# Altium PCB SS_MB_CONV1.1.PcbDoc (part 3 of 3)
Units mil, origin at the board's own origin, x right, y up, seen from the top; angles counter-clockwise.
Board outline 10350 x 8520 mil, 2 copper layers (Top Layer, Bottom Layer); 190 components, 282 nets, 1015 pads, 457 vias.
Unrouted connection lines stored in the file: 1.
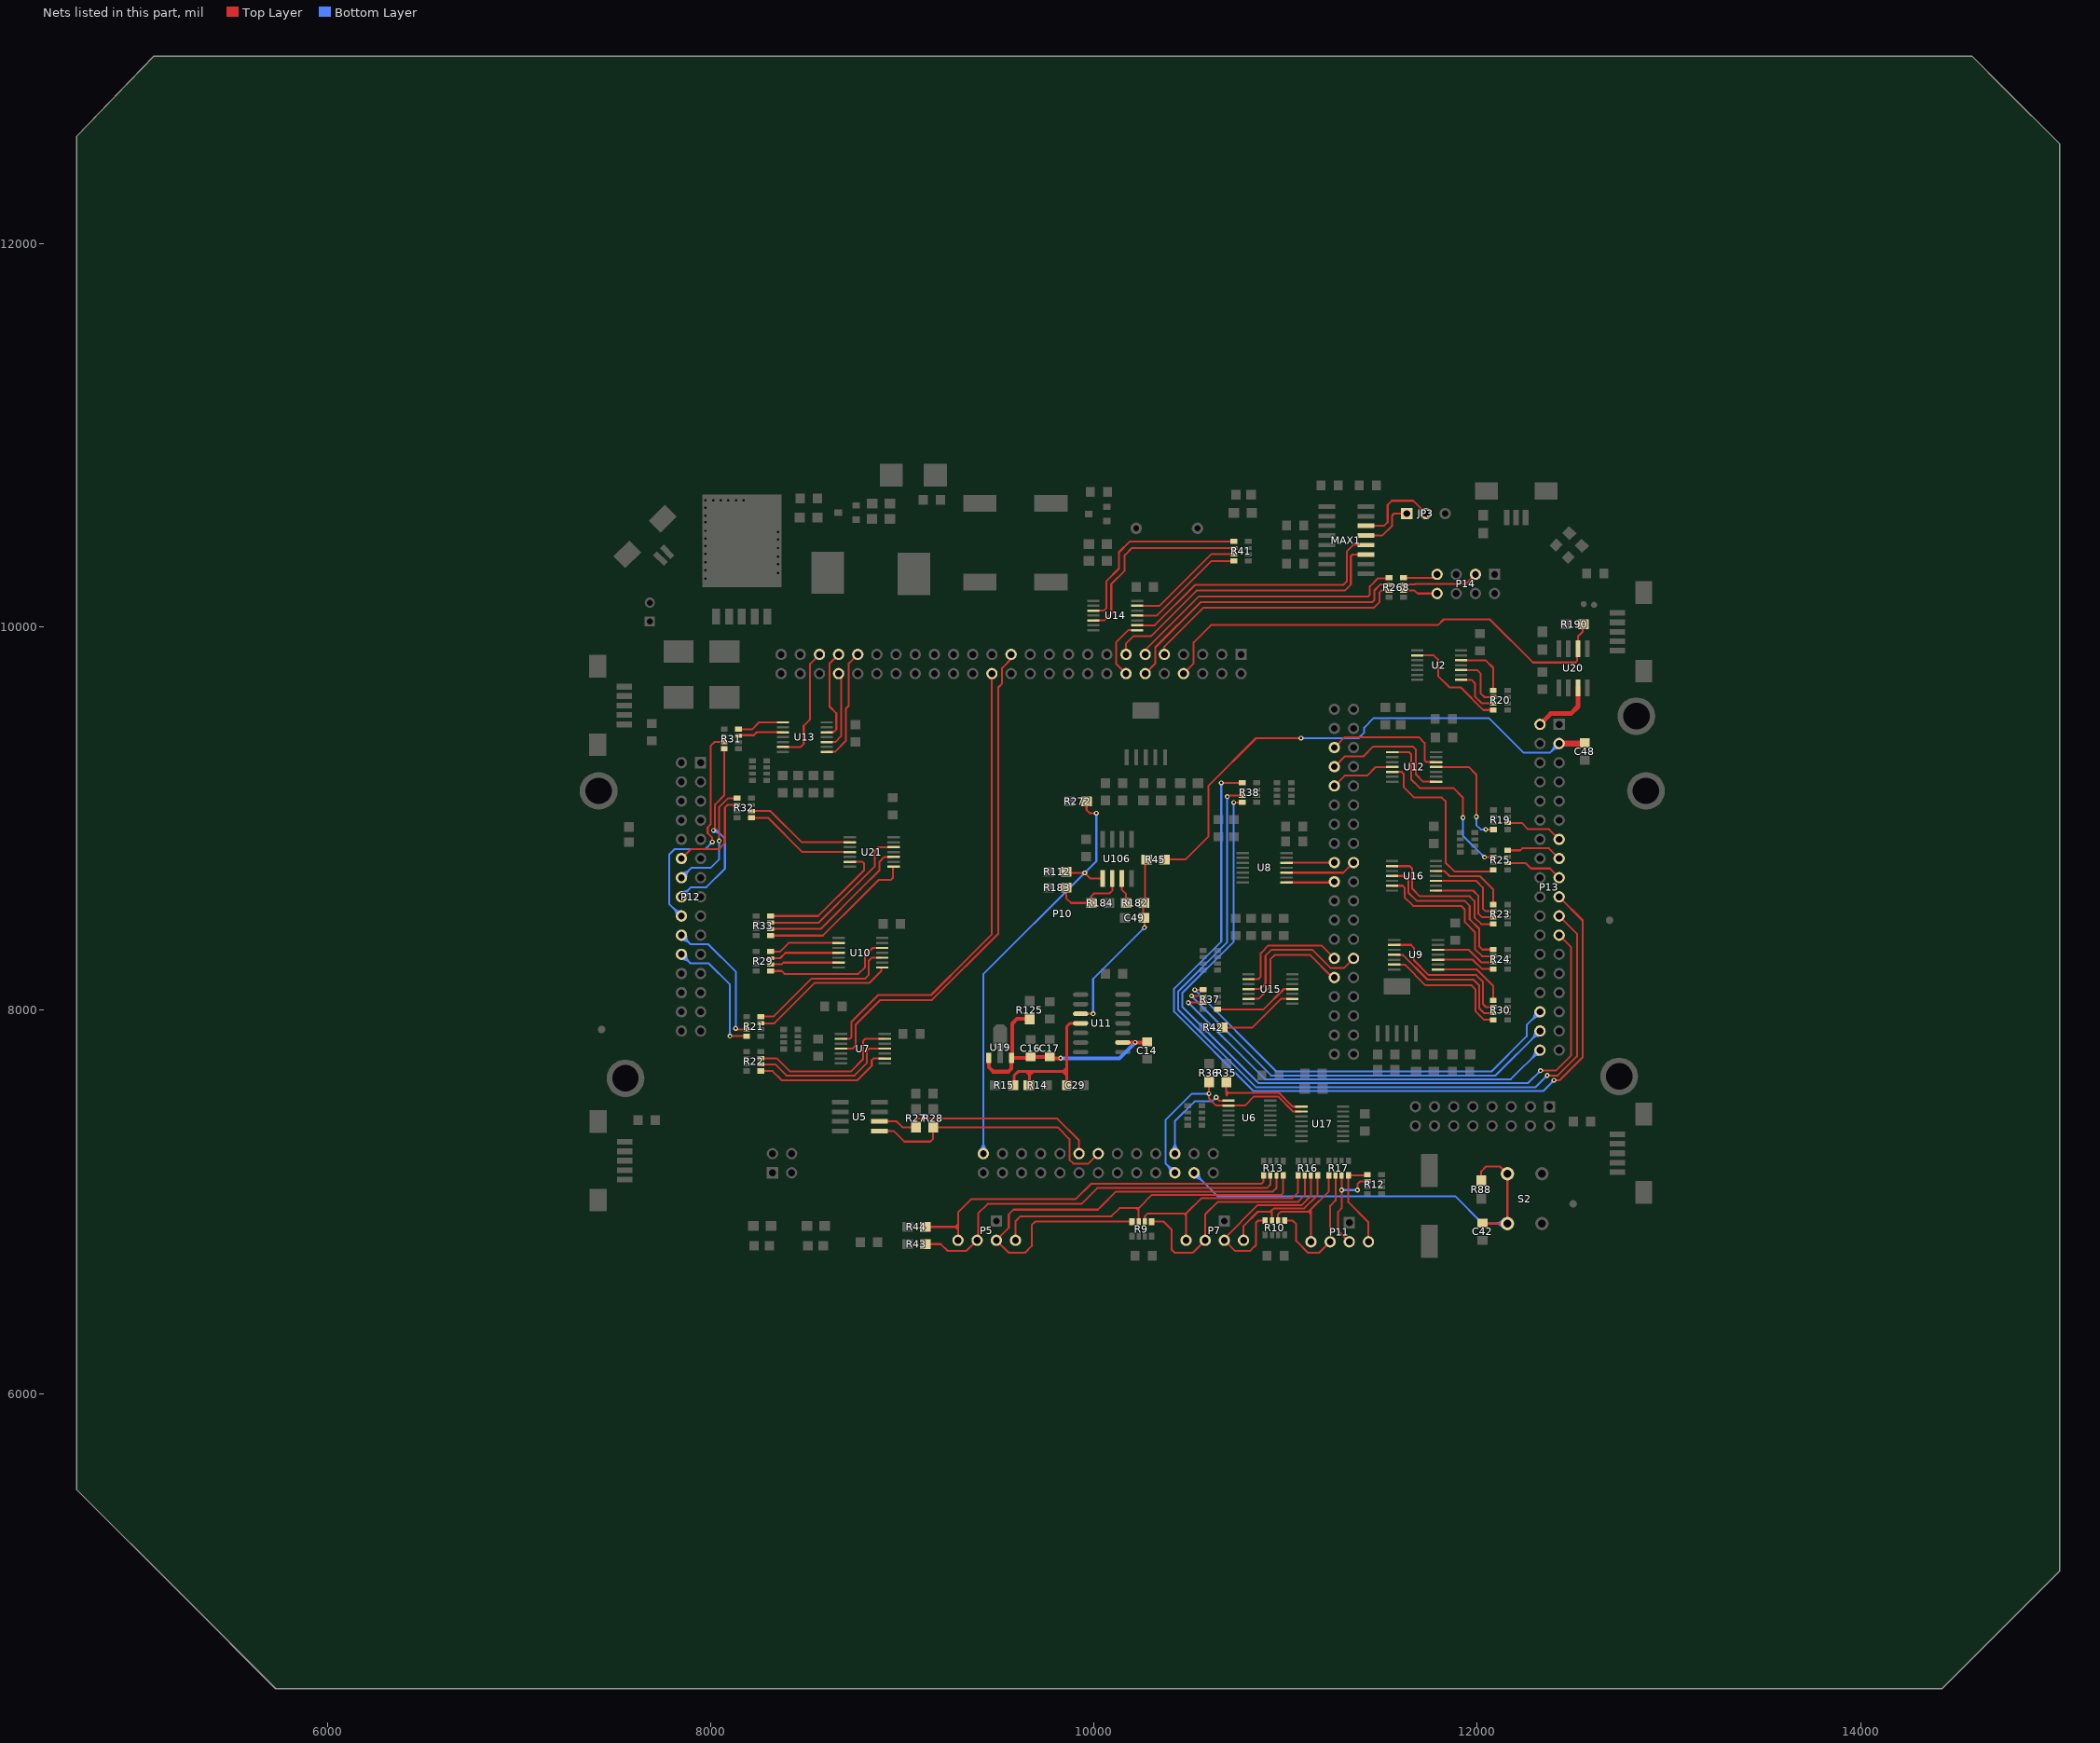
[diagram p3: the nets of this part, all layers, seen from the top]

## Via types
v1: diameter 25, hole 12, Top Layer to Bottom Layer, 365 vias
v2: diameter 50, hole 28, Top Layer to Bottom Layer, 86 vias
v3: diameter 35, hole 28, Top Layer to Bottom Layer, 6 vias

## Nets (pads, with @x,y where several pads share a name; then routed paths per layer and width w, separated by ;. In a path a pad name is that pad's centre, name@x,y a point inside that pad or via, vN(x,y) a via of type N, cw(c..) or ccw(c..) an arc to the next point about the centre after c; other vN are vias at no path point) (continued)
NetR19_7: R19.7 U12.11 | length 665.4
  Top Layer w10: U12.11@11780,9270 11955,9270 11995,9230 v1(11995,9010) ; v1(12044,8944) 12096.01,8944 R19.7@12097.01,8943
  Bottom Layer w10: v1@11989.7,9004.7 cw(c11976.89,8991.89) 11995,8991.89 cw(c12013.11,8991.89) v1@12000.3,9004.7 ; v1(11995,9010) 11995,8967 12018,8944 v1(12044,8944) v1@12046,8944 ; v1@12038.7,8938.7 ccw(c12025.89,8925.89) 12025.89,8944 ccw(c12025.89,8962.11) v1@12038.7,8949.3
NetR20_1: R20.1 U2.12 | length 307.5
  Top Layer w10: U2.12@11910,9826.77 12043.23,9826.77 12083.01,9786.99 R20.1@12083.01,9669
NetR20_3: R20.3 U2.10 | length 292
  Top Layer w10: U2.10@11910,9775.59 11998.41,9775.59 12018,9756 12018,9653 12037,9634 R20.3@12083.01,9634
NetR20_5: R20.5 U2.8 | length 264.1
  Top Layer w10: U2.8@11910,9724.41 11969.59,9724.41 11987,9707 11987,9638 12023,9602 R20.5@12083.01,9602
NetR20_7: R20.7 U2.2 | length 559.5
  Top Layer w10: U2.2@11691.5,9852.36 11772.64,9852.36 11795,9830 11795,9745 11855,9685 11913,9685 12031,9567 R20.7@12083.01,9567
NetR21_2: R21.2 U10.10 | length 799.9
  Top Layer w10: R21.2@8261.81,7967 8327,7967 8526,8166 8806,8166 8825,8185 8825,8260 8840,8275 8889.41,8275 U10.10@8890,8274.41
NetR21_4: R21.4 U10.8 | length 759.5
  Top Layer w10: R21.4@8261.81,7932 8332,7932 8544,8144 8829,8144 8890,8205 U10.8@8890,8223.23
NetR22_4: R22.4 U7.13 | length 797.2
  Top Layer w10: R22.4@8261.81,7750 8344.04,7750 8414.04,7680 8730,7680 8795,7745 8795,7840 8806.18,7851.18 U7.13@8903.5,7851.18
NetR22_6: R22.6 U7.11 | length 761.8
  Top Layer w10: R22.6@8261.81,7718 8337,7718 8395,7660 8750,7660 8815,7725 8815,7790 8825,7800 U7.11@8903.5,7800
NetR22_8: R22.8 U7.9 | length 726.3
  Top Layer w10: R22.8@8261.81,7683 8322,7683 8370,7635 8765,7635 8840,7710 8840,7740 8848.82,7748.82 U7.9@8903.5,7748.82
NetR23_1: R23.1 U16.12 | length 423.2
  Top Layer w10: U16.12@11778.5,8726.77 11828.23,8726.77 11855,8700 12014,8700 12083,8631 R23.1@12083,8552
NetR23_3: R23.3 U16.10 | length 434.6
  Top Layer w10: U16.10@11778.5,8675.59 11994.41,8675.59 12029,8641 12029,8531 12043,8517 R23.3@12083,8517
NetR23_5: R23.5 U16.8 | length 416.7
  Top Layer w10: U16.8@11778.5,8624.41 11978.59,8624.41 12006,8597 12006,8504 12025,8485 R23.5@12083,8485
NetR23_7: R23.7 U16.2 | length 759.5
  Top Layer w10: U16.2@11560,8752.36 11647.64,8752.36 11660,8740 11660,8635 11700,8595 11960,8595 11985,8570 11985,8485 12020,8450 R23.7@12083,8450
NetR24_1: R24.1 U16.4 | length 817.4
  Top Layer w10: U16.4@11560,8701.18 11622.82,8701.18 11640,8684 11640,8615 11685,8570 11935,8570 11960,8545 11960,8475 12010,8425 12010,8333 12026,8317 R24.1@12083,8317
NetR24_3: R24.3 U16.6 | length 794.3
  Top Layer w10: U16.6@11560,8650 11610,8650 11620,8640 11620,8590 11665,8545 11915,8545 11935,8525 11935,8460 11987,8408 11987,8320 12025,8282 R24.3@12083,8282
NetR24_5: R24.5 U9.12 | length 320.2
  Top Layer w10: U9.12@11790,8315.59 11955.41,8315.59 12021,8250 R24.5@12083,8250
NetR24_7: R24.7 U9.10 | length 313.5
  Top Layer w10: U9.10@11790,8264.41 11975.59,8264.41 12025,8215 R24.7@12083,8215
NetR25_3: R25.3 U12.1 | length 998.4
  Top Layer w10: U12.1@11561.5,9346.77 11643.23,9346.77 11655,9335 11655,9205 11700,9160 11875,9160 11925,9110 v1(11925,9005) ; v1(12037,8799) 12038,8800 R25.3@12083.01,8800
  Bottom Layer w10: v1@11919.7,8999.7 cw(c11906.89,8986.89) 11925,8986.89 cw(c11943.11,8986.89) v1@11930.3,8999.7 ; v1(11925,9005) 11925,8911 v1(12037,8799) ; v1@12029.5,8799 ccw(c12011.39,8799) 12024.2,8811.8 ccw(c12037,8824.61) v1@12037,8806.5
NetR25_7: R25.7 U12.5 | length 971.1
  Top Layer w10: U12.5@11561.5,9244.41 11605.59,9244.41 11615,9235 11615,9165 11670,9110 11815,9110 11835,9090 11835,8770 11880,8725 R25.7@12089.01,8725
NetR29_2: R29.2 U10.2 | length 463.3
  Top Layer w10: R29.2@8315,8305 8360,8305 8406.18,8351.18 8671.5,8351.18 8583.82,8351.18
NetR29_4: R29.4 U10.4 | length 403.1
  Top Layer w10: R29.4@8300,8272 8362,8272 8390,8300 8610,8300 ; 8590,8300 8610,8300 ; U10.4@8671.5,8300 8610,8300
NetR29_6: R29.6 U10.6 | length 419
  Top Layer w10: R29.6@8300,8240 8370,8240 8378.82,8248.82 8555,8248.82 ; 8511.18,8248.82 8555,8248.82 ; U10.6@8671.5,8248.82 8555,8248.82
NetR29_8: R29.8 U10.12 | length 697.5
  Top Layer w10: R29.8@8300,8205 8370,8205 8385,8190 8545,8190 ; 8535,8190 8545,8190 ; U10.12@8890,8325.59 8845.59,8325.59 8805,8285 8805,8225 8770,8190 8545,8190
NetR30_1: R30.1 U9.8 | length 404.3
  Top Layer w10: U9.8@11790,8213.23 11997.77,8213.23 12083,8128 R30.1@12083,8052
NetR30_3: R30.3 U9.2 | length 752.4
  Top Layer w10: U9.2@11571.5,8341.18 11653.82,8341.18 11670,8325 11670,8260 11746,8184 11994.08,8184 12030,8148.08 12030,8031 12044,8017 R30.3@12083,8017
NetR30_5: R30.5 U9.4 | length 708.1
  Top Layer w10: U9.4@11571.5,8290 11610,8290 11740,8160 11980,8160 12010,8130 12010,8010 12035,7985 R30.5@12083,7985
NetR30_7: R30.7 U9.6 | length 698.5
  Top Layer w10: U9.6@11571.5,8238.82 11621.18,8238.82 11730,8130 11970,8130 11990,8110 11990,7995 12035,7950 R30.7@12083,7950
NetR31_2: R31.2 U13.1 | length 253.2
  Top Layer w10: R31.2@8142.99,9467 8217,9467 8252.36,9502.36 U13.1@8381.5,9502.36
NetR31_4: R31.4 U13.3 | length 246.4
  Top Layer w10: R31.4@8142.99,9432 8146.61,9435.62 8225,9435.62 8240.56,9451.18 U13.3@8381.5,9451.18
NetR32_6: R32.6 U21.2 | length 599.1
  Top Layer w10: R32.6@8200,9040 8311,9040 8474.23,8876.77 U21.2@8731.5,8876.77
NetR32_8: R32.8 U21.4 | length 605.8
  Top Layer w10: R32.8@8200,9005 8299,9005 8478.41,8825.59 U21.4@8731.5,8825.59
NetR33_2: R33.2 U21.6 | length 694.2
  Top Layer w10: R33.2@8311.81,8492 8561,8492 8766,8697 8800,8731 8800,8766 8791.59,8774.41 U21.6@8731.5,8774.41
NetR33_4: R33.4 U21.12 | length 848.3
  Top Layer w10: R33.4@8311.81,8457 8562,8457 8767,8662 8855,8750 8855,8830 8876.18,8851.18 U21.12@8950,8851.18
NetR33_6: R33.6 U21.10 | length 819.9
  Top Layer w10: R33.6@8311.81,8425 8575,8425 8780,8630 8880,8730 8880,8775 8905,8800 U21.10@8950,8800
NetR33_8: R33.8 U21.8 | length 821.3
  Top Layer w10: R33.8@8311.81,8390 8585,8390 8790,8595 8875,8680 8940,8680 8950,8690 U21.8@8950,8748.82
NetR37_8: R37.8 U15.11 | length 434
  Top Layer w10: R37.8@10640,8005 10885,8005 10991.18,8111.18 U15.11@11030,8111.18
NetR41_1: R41.1 U14.3 | length 1010
  Top Layer w10: U14.3@10001.5,10085.59 10050.59,10085.59 10065,10100 10065,10240 10130,10305 10130,10390 10187,10447 R41.1@10730,10447
NetR41_3: R41.3 U14.5 | length 1022.6
  Top Layer w10: U14.5@10001.5,10034.41 10054.41,10034.41 10090,10070 10090,10225 10160,10295 10160,10375 10197,10412 R41.3@10730,10412
NetR41_5: R41.5 U14.13 | length 621.3
  Top Layer w10: U14.13@10220,10111.18 10342.18,10111.18 10611,10380 R41.5@10730,10380
NetR41_7: R41.7 U14.11 | length 628.1
  Top Layer w10: U14.11@10220,10060 10328,10060 10613,10345 R41.7@10730,10345
NetR42_1: R42.1 U15.9 | length 422.1
  Top Layer w10: R42.1@10670,7910 10826,7910 10976,8060 U15.9@11030,8060
NetR182_1: R182.1 U106.3 | length 153.8
  Top Layer w10: U106.3@10145,8687.64 10145,8629 10167,8607 R182.1@10167,8582 ; R182.1@10167,8560 10167,8599
NetR183_1: R183.1 R184.1 U106.2 | length 416
  Top Layer w10: R183.1@9855,8640 9855,8585 9880,8560 R184.1@9985,8560 9985,8595 10000,8610 10081,8610 10095,8624 U106.2@10095,8687.64
RECEIVE_TO_FPGA: JP3.1 MAX1.13 | length 292.1
  Top Layer w10: MAX1.13@11418.72,10478 11505,10478 11555,10528 11555,10582 11565,10592 JP3.1@11632,10592
RES: P14.7 R268.2 | length 194.5
  Top Layer w10: R268.2@11602.99,10257 11772,10257 P14.7@11790,10275
RES_F: P10.11 R268.1 | length 1477.3
  Top Layer w10: P10.11@10267,9857 10267,9880 10547,10160 11430,10160 11439,10169 11439,10212 11481.19,10254.19 11537.19,10254.19 R268.1@11540,10257
RXD0: MAX1.12 U14.9 | length 1466.6
  Top Layer w10: U14.9@10220,10008.82 10316.82,10008.82 10528,10220 11301,10220 11319,10238 11319,10394 11353,10428 MAX1.12@11418.72,10428 MAX1.12@11416.72,10430
RXD0_F: P10.14 U14.8 | length 315.7
  Top Layer w10: P10.14@10167,9757 10115,9809 10115,9920 10178.23,9983.23 U14.8@10220,9983.23
S1: P5.2 R13.8 R44.1 | length 2070.7
  Top Layer w10: R44.1@9120,6870 9271,6870 ; P5.2@9290,6800 9290,6870 ; 9290,6856 9276,6870 9271,6870 ; 9290,6885 9275,6870 9271,6870 ; R13.8@10885,7150 10885,7106 10874,7095 9985,7095 9904.97,7014.97 9359.97,7014.97 9290,6945 9290,6870 ; 9271,6870 9290,6870
S2: P5.3 R13.6 R43.1 | length 2096.5
  Top Layer w10: R43.1@9120,6780 9200,6780 9235,6745 9335,6745 P5.3@9390,6800 9395,6805 9395,6940 9445,6990 9935,6990 10017,7072 10902,7072 10920,7090 R13.6@10920,7150
S3: P5.4 R9.7 R13.4 | length 2578.2
  Top Layer w10: 10025,6965 10037.5,6977.5 ; R9.7@10198,6897.99 10162.99,6897.99 9692.99,6897.99 9675,6880 9675,6770 9640,6735 9555,6735 P5.4@9490,6800 9555,6865 9555,6935 9580,6960 10020,6960 10037.5,6977.5 ; R13.4@10952,7150 10952,7072 10934,7054 10114,7054 10037.5,6977.5
S4: P5.5 R9.5 R13.2 | length 1754.3
  Top Layer w10: P5.5@9590,6800 9590,6900 9615,6925 10090,6925 10133,6968 10215,6968 ; R9.5@10233,6897.99 10233,6932 10233,6968 ; 10233,6955 10220,6968 10215,6968 ; R13.2@10987,7150 10987,7047 10977,7037 10302,7037 10233,6968 ; 10215,6968 10233,6968
S5: P7.2 R9.3 R16.1 | length 1135.9
  Top Layer w10: R9.3@10265,6897.99 10265,6925 10280,6940 10480,6940 ; 10467,6940 10469,6940 10480,6929 ; P7.2@10480,6800 10480,6929 ; R16.1@11064.5,7150.36 11064.5,7049.5 11035,7020 10561,7020 10480,6939 10480,6929
S6: P7.3 R9.1 R16.3 | length 1247.5
  Top Layer w10: R9.1@10300,6897.99 10362.01,6897.99 10405,6855 10405,6750 10420,6735 10515,6735 P7.3@10580,6800 10580,6935 10646,7001 11066,7001 11099.5,7034.5 R16.3@11099.5,7150.36
S7: P7.4 R10.7 R16.5 | length 1041.3
  Top Layer w10: R10.7@10893,6902.99 10856.99,6902.99 10845,6891 10845,6775 10815,6745 10735,6745 P7.4@10680,6800 10680,6810 10854,6984 11084,6984 11131.5,7031.5 R16.5@11131.5,7150.36
S8: P7.5 R10.5 R16.7 | length 729.1
  Top Layer w10: P7.5@10780,6800 10780,6874 10855,6949 10920,6949 ; R10.5@10928,6902.99 10928,6933 ; R16.7@11166.5,7150.36 11166.5,7036.5 11097,6967 10938,6967 ; 10920,6949 10928,6941 10928,6933 ; 10920,6949 10938,6967 ; 10928,6933 10928,6957 10938,6967
S9: P11.2 R10.3 R17.1 | length 692.5
  Top Layer w10: R10.3@10960,6902.99 10960,6935 10975,6950 11118,6950 ; 11113,6950 11120,6950 11132,6962 ; 11132,6833 P11.2@11132,6792 11132,6918 11132,6962 ; 11132,6935 11132,6936 11118,6950 ; 11132,6950 11118,6950 ; R17.1@11225,7150 11225,7055 11132,6962
S10: P11.3 R10.1 R17.3 | length 762.7
  Top Layer w10: R10.1@10995,6902.99 11036.01,6902.99 11055,6884 11055,6797 11117,6735 11175,6735 P11.3@11232,6792 ; P11.3@11232,6793 P11.3@11232,6792 ; R17.3@11260,7150 11260,7008 11232,6980 P11.3@11232,6792
  Bottom Layer w10: P11.3@11221.06,6812 P11.3@11232,6812
S11: P11.4 R12.3 R17.5 | length 660.4
  Top Layer w10: R17.5@11292,7150 11292,6967 11273.53,6948.53 11273.53,6850.47 P11.4@11332,6792 11302,6822 ; v1(11375,7062) 11375,7093 11390,7108 R12.3@11426.01,7108
  Bottom Layer w10: v1(11292,7062) v1(11375,7062) ; v1@11297.3,7056.7 cw(c11310.11,7043.89) 11310.11,7062 cw(c11310.11,7080.11) v1@11297.3,7067.3 ; v1@11369.7,7056.7 ccw(c11356.89,7043.89) 11356.89,7062 ccw(c11356.89,7080.11) v1@11369.7,7067.3
S12: P11.5 R12.1 R17.7 | length 484.2
  Top Layer w10: R17.7@11327,7132 11327,6998 11432,6893 P11.5@11432,6792 ; R17.7@11327,7139 11422.01,7139 R12.1@11426.01,7143
SA_1: P12.14 R32.1 | length 797.8
  Top Layer w10: v1(8044,8884) 8044,9061 8090,9107 R32.1@8137.01,9107
  Bottom Layer w10: P12.14@7847,8692 7898,8743 7998,8743 8044,8789 v1(8044,8884) ; P12.14@7847,8706.53 ccw(c7847,8741.6) 7871.8,8716.8 ccw(c7896.6,8692) P12.14@7861.53,8692 ; P12.14@7847,8716.53 ccw(c7847,8775.74) 7888.87,8733.87 ccw(c7930.74,8692) P12.14@7871.53,8692 ; v1@8038.7,8878.7 cw(c8025.89,8865.89) 8044,8865.89 cw(c8062.11,8865.89) v1@8049.3,8878.7
SA_1_F: P10.43 U13.12 | length 491.4
  Top Layer w10: U13.12@8600,9451.18 8641.18,9451.18 ; 8644.48,9454.48 8641.18,9451.18 ; P10.43@8667,9857 8620,9810 8620,9585 8655,9550 8655,9465 8641.18,9451.18
SA_2: P13.15 R25.2 | length 293.1
  Top Layer w10: R25.2@12160,8835 12225,8835 12235,8845 12374,8845 P13.15@12427,8792
SA_2_F: P10.144 U12.8 | length 720.5
  Top Layer w10: P10.144@11254,9271 11308,9325 11405,9325 11455,9375 11665,9375 11680,9360 11680,9230 11716.77,9193.23 U12.8@11780,9193.23
SA_3: P13.21 R38.5 | length 4447
  Top Layer w10: v1(10695,9115) 10700,9120 R38.5@10780,9120 ; v1(12365,7660) 12420,7660 12520,7760 12520,8399 P13.21@12427,8492
  Bottom Layer w10: v1@10689.7,9109.7 cw(c10676.89,9096.89) 10695,9096.89 cw(c10713.11,9096.89) v1@10700.3,9109.7 ; v1(10695,9115) 10695,8355 10439,8099 10439,8004 10844,7599 12304,7599 v1(12365,7660) ; v1@12357.5,7660 cw(c12339.39,7660) 12352.2,7647.2 cw(c12365,7634.39) v1@12365,7652.5
SA_3_F: P10.133 U8.10 | length 375.9
  Top Layer w10: U8.10@11000,8718.23 11260,8718.23 11301.23,8718.23 P10.133@11354,8771
SA_4: P12.20 R21.5 | length 894.3
  Top Layer w10: v1(8130,7905) 8135,7900 R21.5@8187.01,7900
  Bottom Layer w10: P12.20@7847,8367.47 cw(c7847,8308.26) 7888.87,8350.13 cw(c7930.74,8392) P12.20@7871.53,8392 ; P12.20@7847,8377.47 cw(c7847,8342.4) 7871.8,8367.2 cw(c7896.6,8392) P12.20@7861.53,8392 ; P12.20@7847,8392 7894,8345 7987,8345 8130,8202 v1(8130,7905) ; v1@8124.7,7910.3 ccw(c8111.89,7923.11) 8130,7923.11 ccw(c8148.11,7923.11) v1@8135.3,7910.3
SA_4_F: P10.28 U7.2 | length 2425.4
  Top Layer w10: U7.2@8685,7851.18 8726.18,7851.18 8735,7860 8735,7941 8874,8080 9150,8080 9360,8290 ; 9367,8297 9360,8290 ; P10.28@9467,9757 9467,8397 9360,8290
SA_DB: P13.32 R37.1 | length 2369.9
  Top Layer w10: v1(10525,8107) R37.1@10577.01,8107
  Bottom Layer w10: v1@10525,8099.5 cw(c10525,8081.39) 10537.8,8094.2 cw(c10550.61,8107) v1@10532.5,8107 ; v1(10525,8107) 10951,7681 12074.1,7681 12257.09,7863.98 12257.09,7922.09 P13.32@12327,7992 ; P13.32@12302.47,7992 cw(c12243.26,7992) 12285.13,7950.13 cw(c12327,7908.26) P13.32@12327,7967.47 ; P13.32@12312.47,7992 cw(c12277.4,7992) 12302.2,7967.2 cw(c12327,7942.4) P13.32@12327,7977.47
SA_DB_F: P10.123 U15.4 | length 787.9
  Top Layer w10: U15.4@10811.5,8111.18 10866.18,8111.18 10895,8140 10895,8285 10925,8315 11140,8315 11235,8220 11303,8220 P10.123@11354,8271
  Bottom Layer w10: P10.123@11354,8271 P10.123@11365,8282
SB_1: P12.12 R32.3 | length 513.8
  Top Layer w10: P12.12@7847,8792 7896,8841 8041,8841 8074,8874 8074,9058 8088,9072 R32.3@8137.01,9072
SB_1_F: P10.41 U13.8 | length 605.4
  Top Layer w10: U13.8@8600,9348.82 8647.82,9348.82 8705,9406 8705,9575 8720,9590 8720,9810 P10.41@8767,9857
SB_2: P13.13 R19.6 | length 302.6
  Top Layer w10: R19.6@12160,8978 12232,8978 12265,8945 12374,8945 P13.13@12427,8892
SB_2_F: P10.146 U12.12 | length 654.7
  Top Layer w10: P10.146@11254,9371 11308,9425 11695,9425 11725,9395 11725,9305 11734.41,9295.59 U12.12@11780,9295.59
SB_3: P13.23 R38.7 | length 4192.9
  Top Layer w10: v1(10729,9085) R38.7@10780,9085 ; v1(12330,7685) 12410,7685 12490,7765 12490,8329 P13.23@12427,8392
  Bottom Layer w10: v1@10723.7,9079.7 cw(c10710.89,9066.89) 10729,9066.89 cw(c10747.11,9066.89) v1@10734.3,9079.7 ; v1(10729,9085) 10729,8359 10461,8091 10461,8018 10859,7620 12265,7620 v1(12330,7685) ; v1@12322.5,7685 cw(c12304.39,7685) 12317.2,7672.2 cw(c12330,7659.39) v1@12330,7677.5
SB_3_F: P10.134 U8.12 | length 264.9
  Top Layer w10: U8.12@11000.59,8770 11000,8769.41 11170,8769.41 ; 11179.41,8769.41 11170,8769.41 ; P10.134@11254,8771 11252.41,8769.41 11170,8769.41
SB_4: P12.18 R31.5 | length 1372.8
  Top Layer w10: v1(8008,8878) 8008,8901 7984,8925 7984,8955 7999,8970 7999,9380 8019,9400 R31.5@8070,9400
  Bottom Layer w10: P12.18@7822.47,8492 ccw(c7763.26,8492) 7805.13,8533.87 ccw(c7847,8575.74) P12.18@7847,8516.53 ; P12.18@7832.47,8492 ccw(c7797.4,8492) 7822.2,8516.8 ccw(c7847,8541.6) P12.18@7847,8506.53 ; P12.18@7847,8492 7783,8556 7783,8812 7812,8841 7971,8841 v1(8008,8878) ; v1@8000.5,8878 cw(c7982.39,8878) 7995.2,8865.2 cw(c8008,8852.39) v1@8008,8870.5
SB_4_F: P10.45 U13.6 | length 610.9
  Top Layer w10: U13.6@8381.5,9374.41 8469.41,9374.41 8485,9390 8485,9485 8518,9518 8518,9808 P10.45@8567,9857
SB_DB: P13.34 R37.3 | length 2331.8
  Top Layer w10: v1(10509,8075) 10574.01,8075 R37.3@10577.01,8072
  Bottom Layer w10: v1@10509,8067.5 cw(c10509,8049.39) 10521.8,8062.2 cw(c10534.61,8075) v1@10516.5,8075 ; v1(10509,8075) 10924,7660 12095,7660 P13.34@12327,7892 ; P13.34@12302.47,7892 cw(c12243.26,7892) 12285.13,7850.13 cw(c12327,7808.26) P13.34@12327,7867.47 ; P13.34@12312.47,7892 cw(c12277.4,7892) 12302.2,7867.2 cw(c12327,7842.4) P13.34@12327,7877.47
SB_DB_F: P10.124 U15.2 | length 615.1
  Top Layer w10: U15.2@10811.5,8162.36 10857.36,8162.36 10870,8175 10870,8298 10910,8338 11187,8338 P10.124@11254,8271
SC_1: P12.16 R31.7 | length 1262.7
  Top Layer w10: v1(8014,8939) 8022,8947 8022,9074 8070,9122 R31.7@8070,9365
  Bottom Layer w10: P12.16@7847,8592 7897,8642 7977,8642 8074,8739 8074,8896 8031,8939 ; P12.16@7847,8606.53 ccw(c7847,8641.6) 7871.8,8616.8 ccw(c7896.6,8592) P12.16@7861.53,8592 ; P12.16@7847,8616.53 ccw(c7847,8675.74) 7888.87,8633.87 ccw(c7930.74,8592) P12.16@7871.53,8592 ; v1@8012.63,8941.09 cw(c8020.55,8928.98) 8030.79,8939.21 ; v1@8014,8931.5 cw(c8014,8872.36) 8055.82,8914.18 ; v1(8014,8939) 8031,8939 ; v1@8014,8941.5 cw(c8014,8906.51) 8038.75,8931.25 ; v1@8018.1,8932.72 cw(c8027.43,8918.44) 8039.5,8930.5 ; v1@8019.54,8933.95 cw(c8031,8923.5) 8031,8939 ; v1@8019.54,8944.06 ccw(c8031,8954.51) 8031,8939
SC_1_F: P10.44 U13.10 | length 424.8
  Top Layer w10: U13.10@8600,9400 8650,9400 8680,9430 8680,9744 P10.44@8667,9757
SC_2: P13.17 R25.6 | length 298.5
  Top Layer w10: R25.6@12160,8768 12252,8768 12280,8740 12379,8740 P13.17@12427,8692
SC_2_F: P10.142 U12.4 | length 348.5
  Top Layer w10: P10.142@11254,9171 11308,9225 11425,9225 11470,9270 U12.4@11561.5,9270
SC_3: P13.19 R38.1 | length 4733.9
  Top Layer w10: v1(10664,9187) R38.1@10780,9187 ; v1(12400,7635) 12430,7635 12550,7755 12550,8469 P13.19@12427,8592
  Bottom Layer w10: v1@10658.7,9181.7 cw(c10645.89,9168.89) 10664,9168.89 cw(c10682.11,9168.89) v1@10669.3,9181.7 ; v1(10664,9187) 10664,8359 10418,8113 10418,7993 10833,7578 12343,7578 v1(12400,7635) ; v1@12392.5,7635 cw(c12374.39,7635) 12387.2,7622.2 cw(c12400,7609.39) v1@12400,7627.5
SC_3_F: P10.132 U8.8 | length 255.6
  Top Layer w10: U8.8@11000,8667.05 11250.05,8667.05 P10.132@11254,8671
SC_4: P12.22 R21.7 | length 851
  Top Layer w10: v1(8100,7865) R21.7@8187.01,7865
  Bottom Layer w10: P12.22@7847,8267.47 cw(c7847,8208.26) 7888.87,8250.13 cw(c7930.74,8292) P12.22@7871.53,8292 ; P12.22@7847,8277.47 cw(c7847,8242.4) 7871.8,8267.2 cw(c7896.6,8292) P12.22@7861.53,8292 ; P12.22@7847,8292 7894,8245 7989,8245 8100,8134 v1(8100,7865) ; v1@8094.7,7870.3 ccw(c8081.89,7883.11) 8100,7883.11 ccw(c8118.11,7883.11) v1@8105.3,7870.3
SC_4_F: P10.25 U7.4 | length 2612.1
  Top Layer w10: U7.4@8685,7800 8740,7800 8755,7815 8755,7924 8885,8054 9154,8054 9500,8400 9500,9685 9520,9705 9520,9786 9567,9833 P10.25@9567,9857
SC_DB: P13.36 R37.5 | length 2324.5
  Top Layer w10: v1(10492.33,8040) R37.5@10577.01,8040
  Bottom Layer w10: v1@10492.33,8032.5 cw(c10492.33,8014.39) 10505.13,8027.2 cw(c10517.93,8040) v1@10499.83,8040 ; v1(10492.33,8040) 10892.33,7640 12175,7640 P13.36@12327,7792 ; P13.36@12302.47,7792 cw(c12243.26,7792) 12285.13,7750.13 cw(c12327,7708.26) P13.36@12327,7767.47 ; P13.36@12312.47,7792 cw(c12277.4,7792) 12302.2,7767.2 cw(c12327,7742.4) P13.36@12327,7777.47
SC_DB_F: P10.122 U15.6 | length 670.8
  Top Layer w10: U15.6@10811.5,8060 10858,8060 10920,8122 10920,8265 10945,8290 11125,8290 11244,8171 P10.122@11254,8171
SCL: P10.94 R35.2 U6.1 U17.1 | length 1248
  Top Layer w10: v1(10637,7546) 10655.05,7527.95 U6.1@10701.5,7527.95 ; R35.2@10690,7611 10690,7581 ; 10692,7554 10692,7558 10704,7570 10709,7570 ; 10987.04,7547 10994.52,7539.52 ; U17.1@11081.5,7497.36 11036.68,7497.36 10994.52,7539.52 ; 10690,7561 10690,7570 10964.04,7570 10994.52,7539.52 ; 10690,7561 10700,7570 10709,7570 ; 10690,7561 10690,7581 ; 10690,7581 10701,7570 10709,7570
  Bottom Layer w10: P10.94@10404.66,7269.34 ccw(c10362.79,7311.21) 10422,7311.21 ccw(c10481.21,7311.21) P10.94@10439.34,7269.34 ; P10.94@10411.73,7262.27 ccw(c10386.93,7287.07) 10422,7287.07 ccw(c10457.07,7287.07) P10.94@10432.27,7262.27 ; P10.94@10422,7252 10422,7422 10525,7525 10616,7525 v1(10637,7546) ; v1@10629.5,7546 cw(c10611.39,7546) 10624.2,7533.2 cw(c10637,7520.39) v1@10637,7538.5
SCL_24: P10.84 R27.1 U5.6 | length 1213.8
  Top Layer w10: U5.6@8880,7420 8970,7420 9000,7390 R27.1@9070,7390 ; R27.1@9068,7392 R27.1@9070,7390 ; P10.84@9922,7252 9922,7321 9808,7435 9078,7435 9070,7427 R27.1@9070,7390
SCLK: P14.8 R268.6 | length 197.5
  Top Layer w10: R268.6@11602.99,10190 11673,10190 11688,10175 P14.8@11789,10175 ; P14.8@11790,10175 P14.8@11789,10175 ; P14.8@11792,10172 P14.8@11789,10175
SCLK_F: P10.9 R268.5 | length 1363.7
  Top Layer w10: P10.9@10367,9857 10367,9897 10570,10100 11460,10100 11489,10129 11489,10179 11500,10190 R268.5@11540,10190
SCS: P14.3 R268.4 | length 409
  Top Layer w10: R268.4@11602.99,10222 11672,10222 11675,10225 11940,10225 P14.3@11990,10275
SCS_F: P10.12 R268.3 | length 1543.5
  Top Layer w10: P10.12@10267,9757 10320,9810 10320,9894 10556,10130 11451,10130 11462.56,10141.56 11462.56,10190.56 11494,10222 R268.3@11540,10222
SDA: P10.93 R36.2 U6.2 U17.2 | length 1392.7
  Top Layer w10: R36.2@10600,7627 10600,7540 10637.57,7502.43 10652.57,7502.43 10701.43,7502.43 U6.2@10701.5,7502.36 10787.36,7502.36 10835,7550 10960,7550 11038.23,7471.77 U17.2@11081.5,7471.77
  Bottom Layer w10: P10.93@10397.47,7152 ccw(c10338.26,7152) 10380.13,7193.87 ccw(c10422,7235.74) P10.93@10422,7176.53 ; P10.93@10407.47,7152 ccw(c10372.4,7152) 10397.2,7176.8 ccw(c10422,7201.6) P10.93@10422,7166.53 ; P10.93@10422,7152 10372.47,7201.53 10372.47,7426.47 10511,7565 v1(10600,7565) ; v1@10594.7,7559.7 ccw(c10581.89,7546.89) 10581.89,7565 ccw(c10581.89,7583.11) v1@10594.7,7570.3
SDA_24: P10.86 R28.1 U5.5 | length 1393.9
  Top Layer w10: U5.5@8880,7370 8955,7370 9010,7315 9145,7315 9160,7330 R28.1@9160,7390 9810,7390 9872,7328 9872,7221 9893,7200 9970,7200 P10.86@10022,7252
SHOOT: P13.2 U20.7 | length 334.2
  Top Layer w25: P13.2@12327,9492 12383,9548 12488,9548 12525,9585 U20.7@12525,9682.64
SHOOT_F: P10.8 R190.2 U20.2 | length 2555.6
  Top Layer w10: P10.8@10467,9757 10520,9810 10520,9920 10610,10010 11795,10010 11825,10040 11990,10040 ; 12010,10040 11990,10040 ; R190.2@12550,10015 12550,9975 12525,9950 U20.2@12525,9887.36 12521,9883.36 12521,9823.95 12512.05,9815 12290,9815 12065,10040 11990,10040
SHOOT_MANUAL: C42.2 P10.95 R88.1 S2.2 | length 2740.3
  Top Layer w10: R88.1@12020,7110 12020,7160 12045,7185 12119,7185 S2.2@12157,7147 12157,6975 S2.2@12157,6887 12030,6887 C42.2@12027,6890 ; 12157,6943 12157,6957 ; 12157,6993 12157,7001
  Bottom Layer w10: P10.95@10522,7127.47 cw(c10522,7068.26) 10563.87,7110.13 cw(c10605.74,7152) P10.95@10546.53,7152 ; P10.95@10522,7137.47 cw(c10522,7102.4) 10546.8,7127.2 cw(c10571.6,7152) P10.95@10536.53,7152 ; P10.95@10522,7152 10644,7030 11884,7030 12027,6887 12090,6887 ; 12036.79,6887 12090,6887 ; S2.2@12134.62,6867.02 ccw(c12090,6827.19) 12090,6887 ; S2.2@12134.62,6906.98 cw(c12090,6946.81) 12090,6887 ; S2.2@12142.08,6873.68 ccw(c12112.34,6847.13) 12112.34,6887 ccw(c12112.34,6926.87) S2.2@12142.08,6900.32 ; S2.2@12157,6887 12090,6887
SHOOT_OFF: P10.74 R112.1 R272.2 U106.1 | length 2560.6
  Top Layer w10: R112.1@9855,8717 v1(9951,8717) 9980.36,8687.64 U106.1@10045,8687.64 ; R272.2@9961,9091 9961,9045 9977,9029 v1(10012,9029)
  Bottom Layer w10: P10.74@9404.66,7269.34 ccw(c9362.79,7311.21) 9422,7311.21 ccw(c9481.21,7311.21) P10.74@9439.34,7269.34 ; P10.74@9411.73,7262.27 ccw(c9386.93,7287.07) 9422,7287.07 ccw(c9457.07,7287.07) P10.74@9432.27,7262.27 ; P10.74@9422,7252 9422,8188 v1(9951,8717) 10012,8778 v1(10012,9029) ; v1@9943.5,8717 cw(c9925.39,8717) 9938.2,8704.2 cw(c9951,8691.39) v1@9951,8709.5 ; v1@9951,8724.5 ccw(c9951,8742.61) 9963.8,8729.8 ccw(c9976.61,8717) v1@9958.5,8717 ; v1@10006.7,9023.7 cw(c9993.89,9010.89) 10012,9010.89 cw(c10030.11,9010.89) v1@10017.3,9023.7
TRANSMIT_TO_PC: JP3.2 MAX1.14 | length 450.8
  Top Layer w10: MAX1.14@11418.72,10528 11513,10528 11532,10547 11532,10637 11554,10659 11665,10659 JP3.2@11732,10592
  Bottom Layer w10: JP3.2@11732,10592 JP3.2@11734,10590
TXD0: MAX1.11 P10.13 | length 1587.6
  Top Layer w10: P10.13@10167,9857 10167,9914 10205,9952 10297,9952 10535,10190 11308,10190 11340,10222 11340,10370 11348,10378 MAX1.11@11418.72,10378
VOLTAGE_BATTERY: C29.2 R14.2 R15.1 U11.4 | length 924
  Top Layer w10: U11.4@9925,7927 U11.4@9930,7932 U11.4@9935,7937
  Top Layer w15: R15.1@9583,7610 9583,7660 9603,7680 9690.5,7680 ; 9646,7680 9663,7663 9663,7662 ; R14.2@9663,7610 9663,7662 ; 9663,7680 9663,7662 ; C29.2@9858,7610 9858,7680 ; 9858,7660 9838,7680 ; 9858,7706 9858,7700 9838,7680 ; U11.4@9930,7932 9875,7932 9858,7915 9858,7680 ; 9663,7662 9681,7680 9690.5,7680 ; 9690.5,7680 9838,7680 ; 9838,7680 9858,7680
VOLTAGE_CAP: C48.2 P13.3 R45.1 | length 2938.1
  Top Layer w10: R45.1@10368,8787 10477,8787 10596,8906 10596,9171 10845,9420 v1(11080,9420)
  Top Layer w30: P13.3@12427,9392 C48.2@12560,9392
  Bottom Layer w10: v1(11080,9420) 11380,9420 11410,9450 11410,9475 11460,9525 12060,9525 12240,9345 12380,9345 P13.3@12427,9392 ; v1@11085.3,9414.7 cw(c11098.11,9401.89) 11098.11,9420 cw(c11098.11,9438.11) v1@11085.3,9425.3 ; P13.3@12402.47,9392 cw(c12343.26,9392) 12385.13,9350.13 cw(c12427,9308.26) P13.3@12427,9367.47 ; P13.3@12412.47,9392 cw(c12377.4,9392) 12402.2,9367.2 cw(c12427,9342.4) P13.3@12427,9377.47
VOLTAGE_CAP1: C49.2 R45.2 R182.2 U11.3 | length 1038
  Top Layer w10: U11.3@9930,7982 v1(9995,7982) ; C49.2@10255,8477 C49.2@10260,8482 ; C49.2@10257,8485 R182.2@10257,8560 ; v1(10263,8432) C49.2@10263,8477 ; R182.2@10267,8557 R45.2@10267,8782 ; R45.2@10278,8787 R45.2@10278,8790
  Bottom Layer w10: v1@9989.7,7987.3 ccw(c9976.89,8000.11) 9995,8000.11 ccw(c10013.11,8000.11) v1@10000.3,7987.3 ; v1(9995,7982) 9995,8164 v1(10263,8432) ; v1@10255.5,8432 cw(c10237.39,8432) 10250.2,8419.2 cw(c10263,8406.39) v1@10263,8424.5
VREF: C14.2 C16.2 C17.2 R125.1 U11.9 U19.1 U19.3 | length 1334
  Top Layer w20: U19.1@9450.94,7752.37 9450.94,7702.06 9473,7680 9553,7680 9569.06,7696.06 U19.3@9569.06,7752.37 U19.3@9572.4,7752.37 ; R125.1@9668,7955 9597.12,7955 9572.4,7930.28 U19.3@9572.4,7752.37 ; v1(9826,7750) 9777,7750 C17.2@9770,7757 C16.2@9670,7757 9665.37,7752.37 U19.3@9572.4,7752.37 ; U11.9@10150,7832 10225,7832 C14.2@10275,7832
  Bottom Layer w20: v1(9826,7750) 10133,7750 v1(10215,7832)
pads on no net: JP1. JP2. MAX1.7 MAX1.8 MAX1.9 MAX1.10 P1. P1.2 P2. P2.2 P3. P3.2 P4. P4.2 P6.1 P8.1 P9.1 P10.20 P10.21 P10.46 P10.49 P10.50 P10.73 P10.75 P10.76 P10.77 P10.78 P10.79 P10.80 P10.82 P10.87 P10.91 P10.98 P10.113 P10.125 R12.5 R12.6 R12.7 R12.8 R34.6 R38.3 R38.4 R39.3 R50.1 R50.2 U3.7 U3.9 U3.11 U6.7 U6.13 U6.14 U8.2 U11.1 U11.5 U11.6 U14.2 U15.12 U20.1 U20.8 U106.7

## Polygon pours and split planes (outlines as drawn)
GND on Top Layer "T Layer-gnd" (hatched 90Degree grid 20 track 10, remove dead copper, pour order 1000): 6894,11308 12848,11308 13251,10905 13251,6522 12631,5902 7029,5902 6502,6429 6502,10916 6894,11308
GND on Bottom Layer "T Layer-gnd" (hatched 90Degree grid 20 track 10, remove dead copper, pour order 1001): 6688,11318 12962,11318 13282,10998 13282,6377 12662,5757 7132,5757 6398,6491 6398,11008 6698,11308

## Keep-outs
Keep-Out Layer:
  lines w0: 13044.98,6949.98 13044.98,7598.96
  lines w10: 7236.56,7605.18 ccw(c7178.73,7741.42) 7236.56,7877.65 ; 7237,7605 7237,6967 7447,6757 ; 7237,7877 7237,10242.49 7873.52,10879.01 7888,10879.01 12409.23,10879.01 ; 7437,6767 7447,6757 ; 12409.23,10878.23 13044.98,10242.48 ; 13044.12,7598.96 cw(c13084.24,7741.42) 13044.43,7883.96 ; 13044.98,6949.98 13044.98,7598.96 ; 13044.98,7883.58 13044.98,10234.02 ; 7447,6757 7629,6575 10503.11,6575 12663,6575 12847,6759 ; 12847,6759 12847,6759.02 ; 12847,6759.02 13044.98,6957 ; 12847,6759.02 13044.98,6957 ; 12847,6759.02 13044.98,6957

## Other copper
Top Layer:
  region net +5V1: 8657,10112 8657,10432 8437,10432 8437,10112
  region net NetD4_2: 9267,10097 9267,10432 9037,10432 9037,10097
  rectangle net 3.3V: 11018,8189 11045,8233
  rectangle net SCL: 10685,7527.95 10701.5,7570
  rectangle net +5V: 9975,8876 10045,8906
  rectangle net +5V: 10060,9296 10221,9342
  rectangle net NetC35_1: 8004,10009 8049,10097
  rectangle net GND: 9970,9930 10013,9983.23
  rectangle net GND: 11049,7300 11114,7323
  rectangle net +3.3V: 11193,7503.19 11219,7572
  rectangle net +3.3V: 11206.09,7490 11424,7516
  rectangle net +3.3V: 11388,7460 11424,7514
Bottom Layer:
  region net GND: 8382,10207 8382,10697 7942,10697 7942,10207
  region net NetD4_2: 9267,10097 9267,10432 9037,10432 9037,10097
  region net +5V1: 8652,10102 8652,10437 8422,10437 8422,10102

## Silkscreen, mask and mechanical layers (free items; w line width, h text height)
Top Overlay:
  circle w10: c10745,7155 r32.36
  circle w10: c10742.64,7250 r32.36
  circle w10: c10144.72,8632.79 r3385.83
  region: 12055,6665 12415,6665 12415,6620 12485,6690 12415,6760 12415,6715 12055,6715 12055,6665
  lines w5: 12209.58,8906.42 12248.58,8906.42 12263,8892 12290,8892 ; 12220,8014 12267,8014 12289,7992 ; 12224,8224 12261,8224 12292,8193 ; 12225,9010 12261,9010 ; 12230,8317 12270,8317 12294,8293 ; 12231.26,7923.74 12267.26,7923.74 12293,7898 ; 12232,8517 12270,8517 12295,8492 ; 12263,9010 12282,8991 12291,8991
  lines w10: 7249.99,8814.48 7644.93,8814.48 7644.93,8021.48 7253.53,8021.48 ; 7797,8542 7902,8542 7932,8512 ; 7800,8642 7907,8642 7932,8617 ; 7802,8342 7912,8342 7932,8322 ; 7802,8447 7887,8447 7892,8447 7932,8407 ; 7802,8742 7897,8742 7922,8717 ; 7805,8037 7902,8037 7922,8017 ; 7807,7942 7897,7942 7922,7917 ; 7812,8847 7892,8847 7922,8817 ; 7888.87,8242 7927,8242 7942,8227 ; 7895,8137 7917,8137 7932,8122 ; 10080,10515 10130,10515 ; 10105,10490 10105,10540 ; 10660,7302 10815,7302 10815,7107 10815,7102 ; 10672,7102 10814,7102 10815,7103 ; 11471,7028 11471,10762 ; 11472,9831 11589,9831 11589,10002 ; 12329,9440 12375,9440 12395,9420
  text "INFRAIN" at 12090,10415 h30
  text "EB2" at 12510,10140 h30
  text "EA2" at 12608,10136 h30
  text "EA2" at 12605,10065 h30
  text "5V" at 12620,10015 h30
  text "EB2" at 12605,9960 h30
  text "GND" at 12664,9820 h30
  text "GND" at 7608,9723 h30
  text "EB1" at 7607,9592 h30
  text "5V" at 7600,9524 h30
  text "GND" at 12487,9488 h30
  text "SHOOT" at 12155,9475 h30
  text "VOLTAGE_CAP" at 11997,9430 h30
  text "EA1" at 7575,9420 h30
  text "CHIP" at 12180,9380 h30
  text "+16V" at 7694,9280 h30
  text "GND" at 12200,9280 h30
  text "CT_2" at 12477,9179 h30
  text "CB_2" at 12181.56,9178.44 h30
  text "BB_2" at 12183,9086 h30
  text "5V" at 7751,9080 h30
  text "BT_2" at 12465,9079 h30
  text "AB_2" at 12209,9024 h30
  text "AT_2" at 12477,8977 h30
  text "GND" at 7761,8929 h30
  text "F_DB" at 12206,8924 h30
  text "SB_2" at 12464,8876 h30
  text "V_CAP" at 7285,8845 h40
  text "AB_1" at 7687,8832 h30
  text "F_2" at 12200,8790 h30
  text "SB_1" at 7687,8782 h30
  text "SA_2" at 12477,8780 h30
  text "AT_1" at 7692,8727 h30
  text "SA_1" at 7687,8682 h30
  text "SC_2" at 12477,8681 h30
  text "F_3" at 12205,8675 h30
  text "BB_1" at 7687,8627 h30
  text "ATDB" at 12182,8591 h30
  text "SC_3" at 12477,8576 h30
  text "SC_1" at 7687,8572 h30
  text "ABDB" at 12203,8526 h30
  text "BT_1" at 7687,8522 h30
  text "SB_4" at 7687,8477 h30
  text "SA_3" at 12477,8477 h30
  text "CB_1" at 7687,8432 h30
  text "SA_4" at 7687,8382 h30
  text "BTDB" at 12170,8375 h30
  text "SB_3" at 12477,8375 h30
  text "CT_1" at 7687,8337 h30
  text "BBDB" at 12204,8325 h30
  text "SC_4" at 7687,8287 h30
  text "AB_3" at 12477,8277 h30
  text "CTDB" at 12202,8233 h30
  text "FAULT_1" at 7687,8227 h30
  text "AT_3" at 12477,8181 h30
  text "CT_4" at 7687,8177 h30
  text "FAULT_4" at 7687,8127 h30
  text "CBDB" at 12183,8094 h30
  text "CB_4" at 7687,8082 h30
  text "BB_3" at 12477,8078 h30
  text "AB_4" at 7687,8027 h30
  text "SADB" at 12202,8023 h30
  text "BT_3" at 12477,7979 h30
  text "BT_4" at 7687,7977 h30
  text "SBDB" at 12203,7931 h30
  text "AT_4" at 7687,7927 h30
  text "BB_4" at 7687,7882 h30
  text "CB_3" at 12477,7880 h30
  text "CT_3" at 12477,7781 h30
  text "SCDB" at 12161,7775 h30
  text "EA3" at 12542,7335 h30
  text "GND" at 7642,7297 h30
  text "5V" at 12610,7290 h30
  text "EB3" at 12543,7233 h30
  text "SHOOT/CHIP" at 12055,7215 h40
  text "EB4" at 7637,7202 h30
  text "5V" at 7642,7152 h30
  text "GND" at 12600,7141 h30
  text "EA4" at 7637,7097 h30
  text "S9-12" at 11192,7075 h30
  text "S2-8" at 11000,7069 h30
  text "S1-4" at 10775,7060 h30
  text "SS_MB_CON" at 7669.07,6935.64 h80 r359.92
  text "SN:130114" at 7667,6847 h80
  text "V1.1T" at 7667.63,6769.2 h80
  text "DIP" at 12215,6760 h40
  text "GND" at 12630,6710 h30
  text "SUPCON" at 7665.41,6682.12 h80
  text "freq" at 9101,6664 h40
  text "HEART" at 8175,6655 h40
  text "set" at 11500,6655 h40
  text "COMM" at 8470,6650 h40
  text "num" at 10277,6632 h40
Top Solder:
  region: 12915,6830 12823.08,6921.92 12681.65,6780.5 12773.58,6688.58
Mechanical 1:
  lines w10: 7015,7179.35 ccw(c7232.17,7184.18) 7237,6967 ; 7020,7184.35 7020,10015 cw(c7237.18,10019.83) 7232.35,10237 ; 7236.56,7605.18 ccw(c7178.73,7741.42) 7236.56,7877.65 ; 7620.56,6125 7620.56,6573.89 ; 7620.56,6150.56 ccw(c7820.56,6155) 7825,5955 ; 7785,5955 12485,5955 ; 7873.26,10878.74 7237,10242.49 ; 7873.52,10879.01 7873.52,10971.48 cw(c8090.7,10976.3) 8085.87,11193.48 12192.63,11193.48 ; 7880,10879.01 12408.46,10879.01 ; 12196.83,11189.28 cw(c12201.28,10989.28) 12401.28,10993.72 ; 12409.23,10878.23 12409.23,10985.77 ; 12409.23,10879.01 13044.98,10242.48 13044.98,7887 ; 12455,5955 ccw(c12450.56,6155) 12650.56,6159.44 ; 12655,6175 12655,6575 7629,6575 7237,6967 ; 13039.44,10240 cw(c13043.89,10040) 13243.89,10044.44 13243.89,7167.8 ; 13044.12,7598.96 cw(c13084.24,7741.42) 13044.43,7883.96 ; 13044.98,6960 ccw(c13040.53,7160) 13240.54,7164.44 ; 13044.98,7073.85 13044.98,7598.96 ; 13044.98,7122 13044.98,6954.98 ; 7237,6967 7237,7605 7237,6967 ; 7237,10242.49 7237,7877 7237,10242.49 ; 13044.98,6954.98 12695,6605 13044.98,6954.98

## Text inside footprints (layer, text, board x,y; h text height)
C2: Top Overlay "+" at 9340,10155 h20
C4: Top Overlay "+" at 11670,7230 h20 r270
C35: Top Overlay "+" at 7662,9917.43 h20 r90
C51: Top Overlay "+" at 9340,10565 h20
L1: Top Overlay "L" at 8455,10460 h40
P12: Bottom Overlay "1" at 7967,9364 h30 r90; Bottom Overlay "2" at 7858,9371 h30 r90; Bottom Overlay "29" at 7967,7832 h30 r90; Bottom Overlay "30" at 7867,7832 h30 r90
P13: Bottom Overlay "2" at 12295,9559 h30; Bottom Overlay "1" at 12437,9561 h30; Bottom Overlay "35" at 12449,7700 h30; Bottom Overlay "36" at 12346,7702 h30
P14: Top Overlay "2" at 12155,10160 h30; Top Overlay "1" at 12155,10265 h30; Top Overlay "7" at 11709,10262 h30; Top Overlay "8" at 11708,10157 h30
U3: Top Overlay "2" at 12439,7354 h30; Top Overlay "1" at 12448,7488 h30; Top Overlay "15" at 11540.24,7489.76 h30; Top Overlay "16" at 11574,7388 h30